# Altium PCB ESP32 with USBC PCB V1.PcbDoc (part 1 of 2)
Units mil, origin at the board's own origin, x right, y up, seen from the top; angles counter-clockwise.
Board outline 2700 x 1000 mil, 4 copper layers (L1, L2, L3, L4), stack 61.581 mil thick; 66 components, 75 nets, 307 pads, 155 vias.
Unrouted connection lines stored in the file: 1.
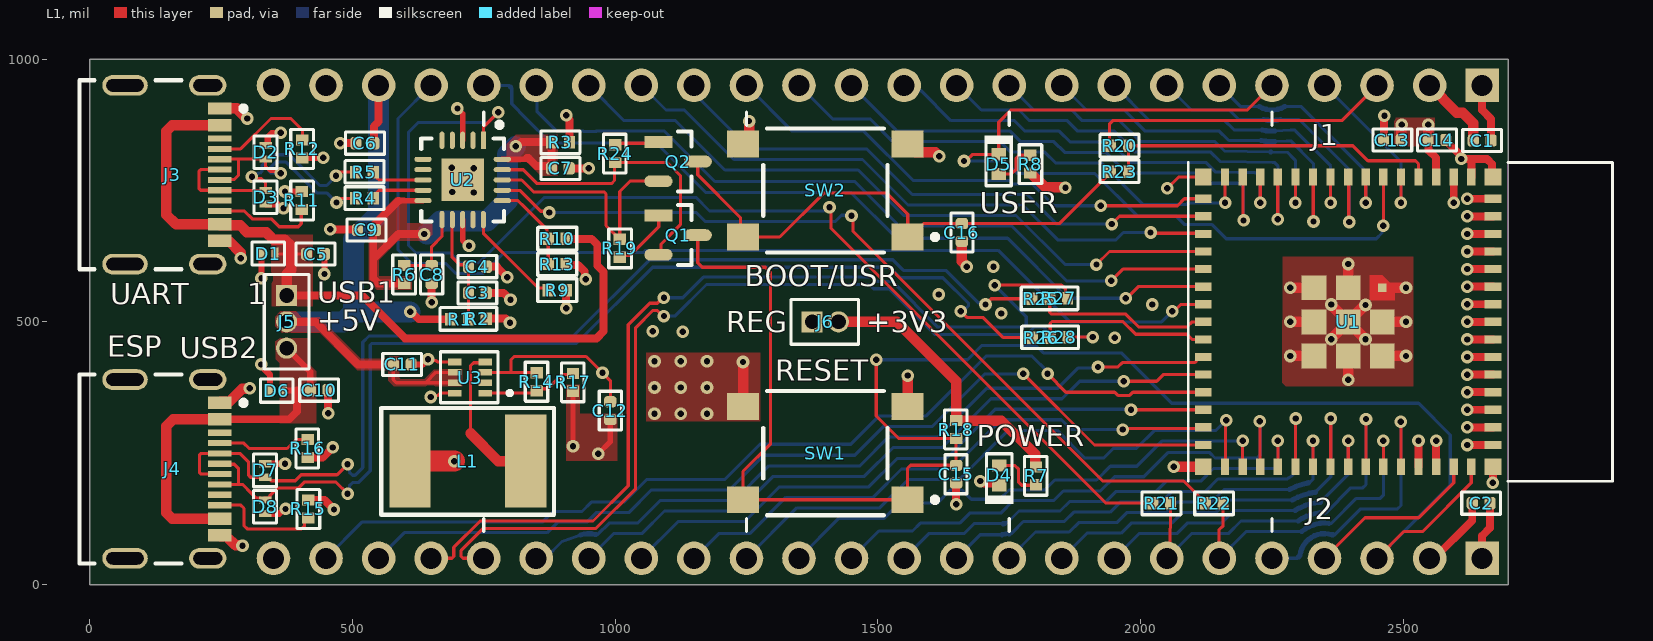
[diagram p0: L1 view]
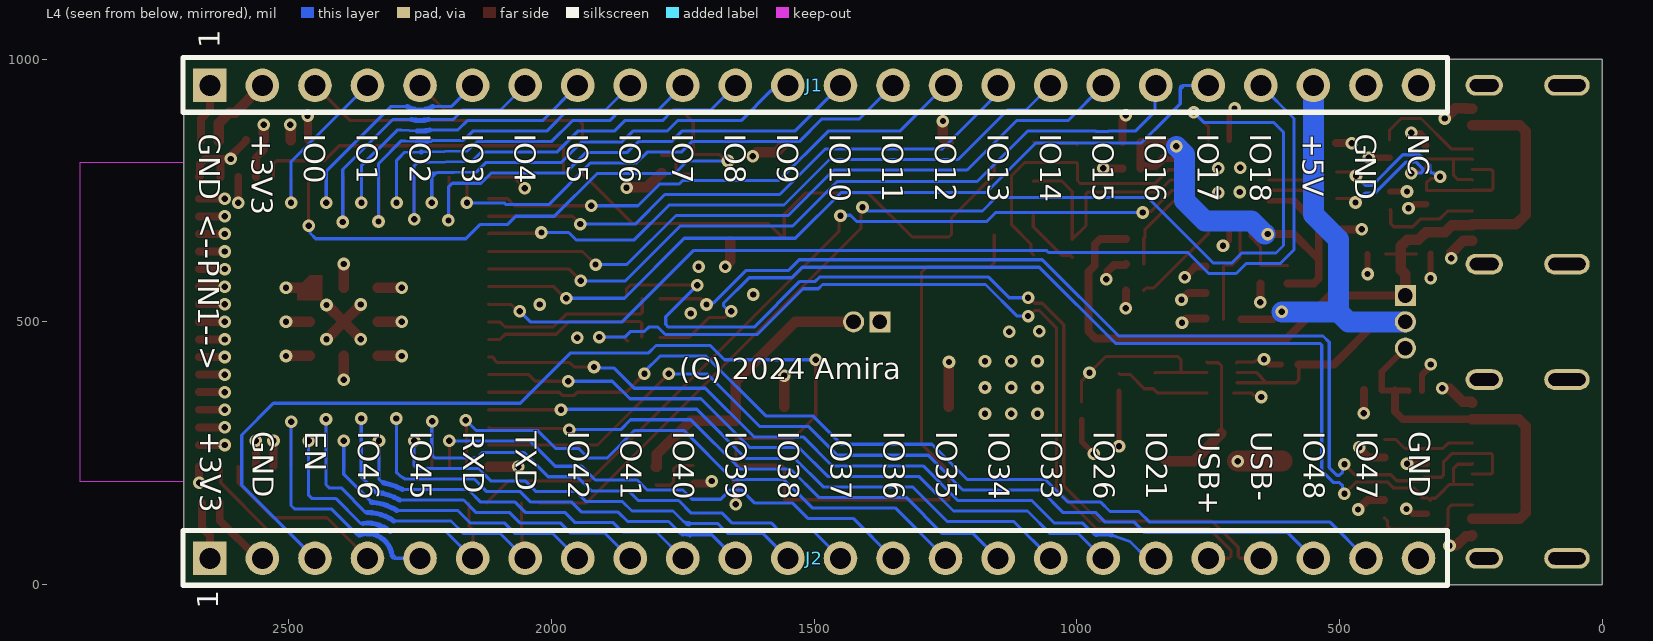
[diagram p1: L4 view, seen from below]
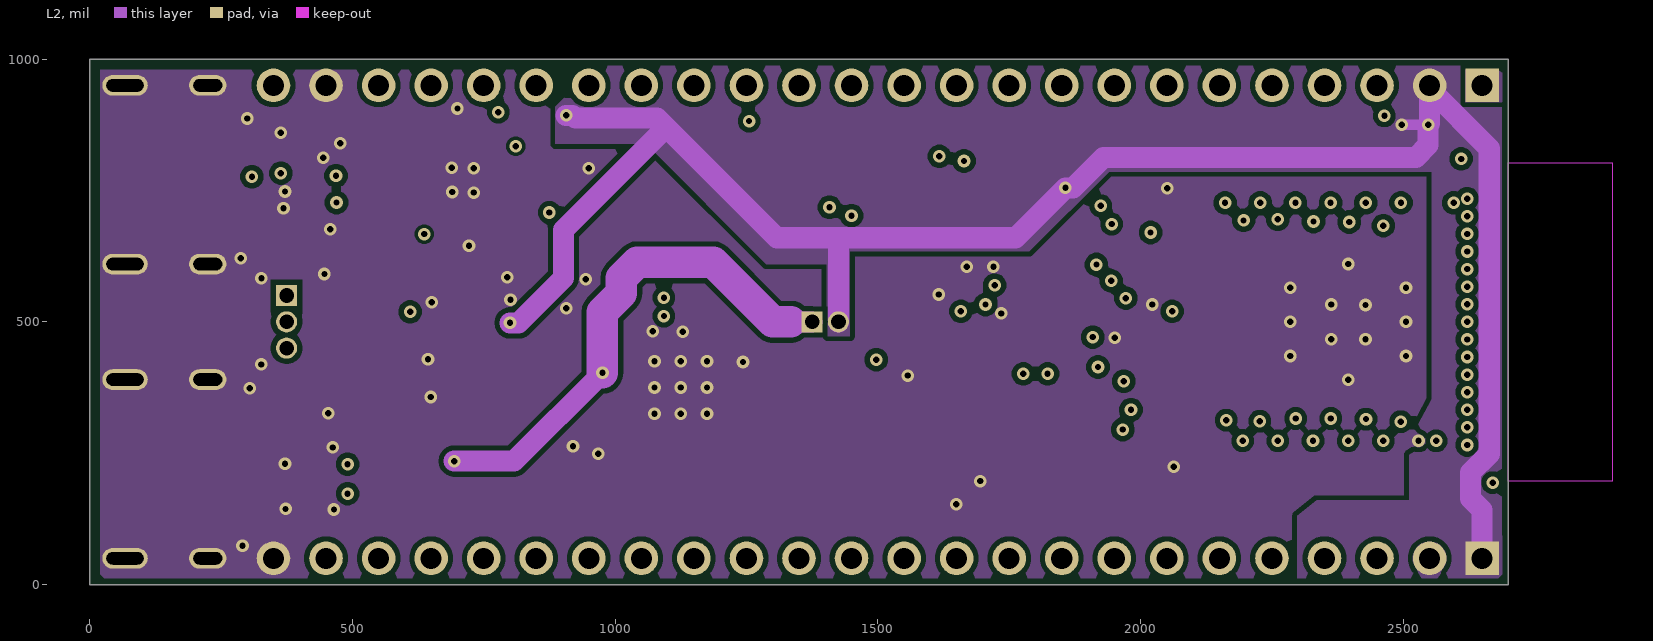
[diagram p2: L2]
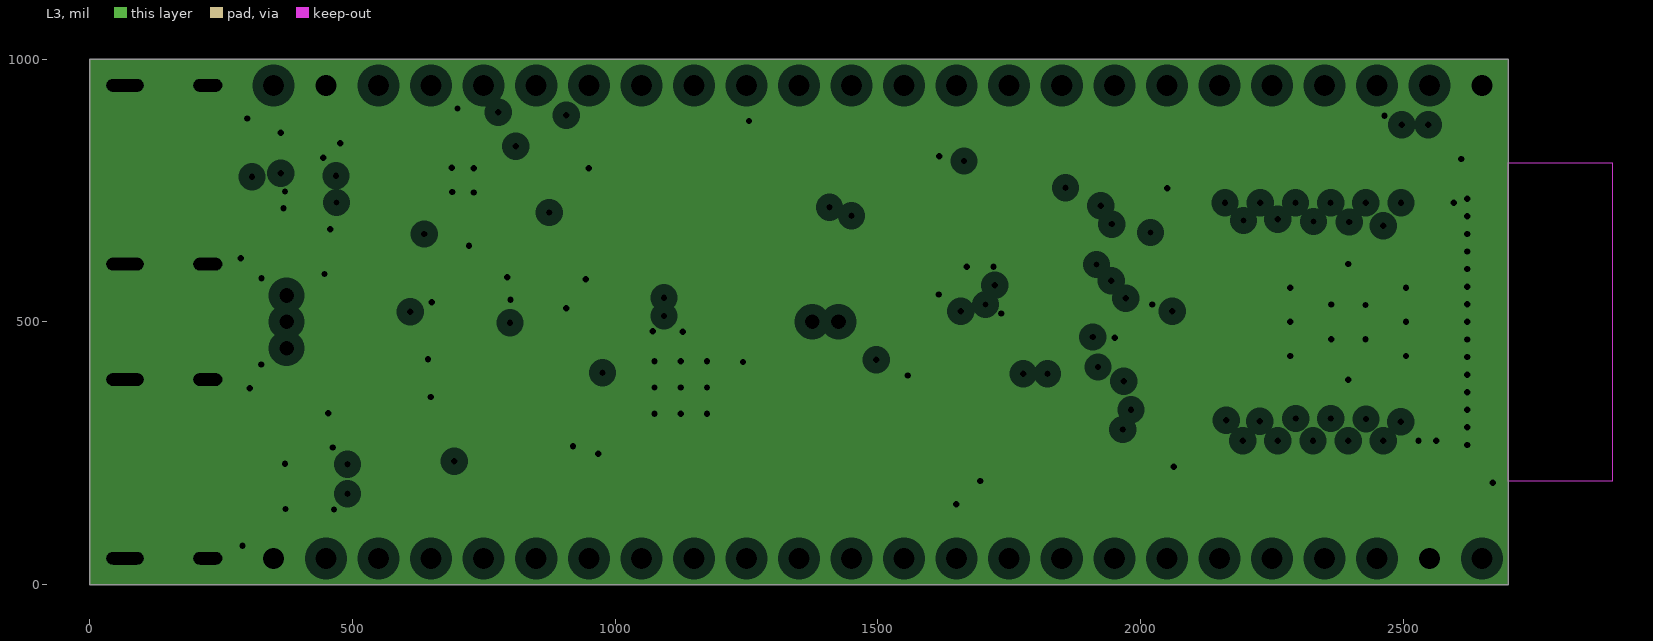
[diagram p3: L3, clearances drawn from the general rule]
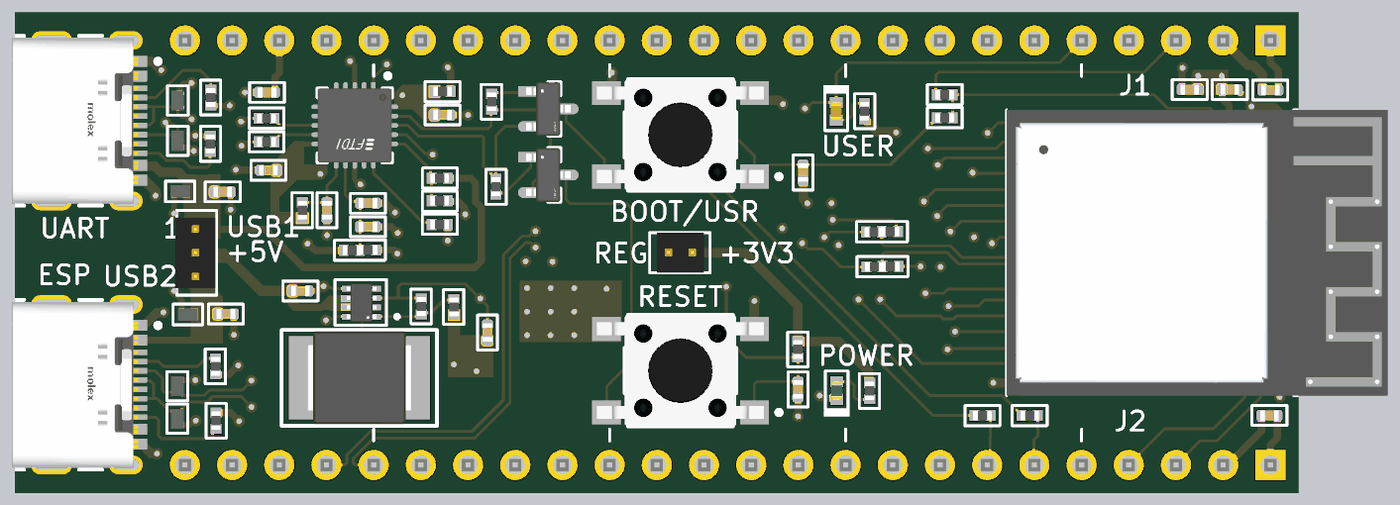
[diagram p4: 3D render of the assembled board from above, using the file's embedded part models]

## Layer stack, top to bottom
Top Solder: solder mask 0.4, Solder Resist, Dk 3.5
L1: signal copper 1.378
Dielectric 2: prepreg 3.913, PP-006, Dk 4.1
L2: signal copper 0.598
Dielectric 1: dielectric 49.803, FR-4, Dk 4.8
L3: plane copper 0.598, net GND
Dielectric 3: prepreg 3.913, PP-006, Dk 4.1
L4: signal copper 1.378
Bottom Solder: solder mask 0.4, Solder Resist, Dk 3.5

## Board outline
0,0 2700,0 2700,1000 0,1000

## Design rules (kind name [scope] priority, off if disabled: settings)
Clearance SMALLER [WithinRoom('FTDI') or WithinRoom('USBC2') or WithinRoom('USBC1') OR WithinRoom('CONVERTOR')] p1: gap=6 ignorepadtopadclearanceinfootprint=FALSE
Clearance DIFF90Clearance [InDifferentialPairClass('DIFF90')] p2: gap=8 ignorepadtopadclearanceinfootprint=FALSE
Clearance [All] p3: gap=10 ignorepadtopadclearanceinfootprint=FALSE except(6: SMDPad-SMDPad)
ComponentClearance R28R26 [InComponent('R28') vs InComponent('R26')] p1: gap=0 collisioncheckmode=3 verticalgap=0 showdistances=FALSE
ComponentClearance R1R2 [InComponent('R1') vs InComponent('R2')] p2: gap=0 collisioncheckmode=3 verticalgap=0 showdistances=FALSE
ComponentClearance R25R27 [InComponent('R25') vs InComponent('R27')] p3: gap=0 collisioncheckmode=3 verticalgap=0 showdistances=FALSE
ComponentClearance [All] p4: gap=10 collisioncheckmode=3 verticalgap=10 showdistances=FALSE
DiffPairsRouting DIFF90 [InDifferentialPairClass('DIFF90')] p1: maxlimit=8.1 minlimit=7 mostfreqgap=8 toplayer_minwidth=6.03 toplayer_maxwidth=6.23 toplayer_prefwidth=6.03 midlayer1_minwidth=5.1 midlayer1_maxwidth=5.2 midlayer1_prefwidth=5.1 bottomlayer_minwidth=6.03 bottomlayer_maxwidth=6.23 bottomlayer_prefwidth=6.03 maxuncoupledlength=500
MinimumSolderMaskSliver [All] p1: minsoldermaskwidth=3.15
PlaneClearance [All] p1: clearance=20
PlaneConnect [All] p1: pad.planeconnectstyle=Relief pad.reliefexpansion=20 pad.reliefentries=4 pad.reliefconductorwidth=20 pad.reliefairgap=10 via.planeconnectstyle=Direct via.reliefexpansion=20 via.reliefentries=4 via.reliefconductorwidth=10 via.reliefairgap=10
PolygonConnect [All] p1: connectstyle=Direct reliefconductorwidth=10 reliefentries=4 polygonreliefangle="90 Angle" airgapwidth=10
RoomDefinition CONVERTOR [False vs False] p1: confinementstyle=ConfineIn formatcopy=TRUE lockcomponents=FALSE outline 661,447 790,447 790,341 661,341
RoomDefinition USBC2 [False vs False] p2: confinementstyle=ConfineIn formatcopy=TRUE lockcomponents=FALSE outline 153,370 308,370 308,73 153,73
RoomDefinition USBC1 [False vs False] p3: confinementstyle=ConfineIn formatcopy=TRUE lockcomponents=FALSE outline 171,925 301,925 301,635 171,635
RoomDefinition FTDI [False vs False] p4: confinementstyle=ConfineIn formatcopy=TRUE lockcomponents=FALSE outline 827,650 600,650 600,895 827,895
RoutingVias [All] p1: holewidth=12 width=24 viastyle="Through Hole" minholewidth=12 minwidth=24 maxholewidth=12 maxwidth=24
SilkToSilkClearance [All] p1: silktosilkclearance=6
SilkToSolderMaskClearance [IsPad] p1: minsilkscreentomaskgap=6 clearancetoexposedcopper=TRUE
SolderMaskExpansion [All] p1: expansion=2 istentingtop=FALSE
SupplyNets "Schematic Supply Nets_6" [InNet('GND')] p1: voltage=0.000
SupplyNets "Schematic Supply Nets_5" [InNet('+3V3 REG')] p2: voltage=0.000
SupplyNets "Schematic Supply Nets_4" [InNet('+5V_VBUS2')] p3: voltage=0.000
SupplyNets "Schematic Supply Nets_3" [InNet('+5V_VBUS1')] p4: voltage=0.000
SupplyNets "Schematic Supply Nets_1" [InNet('+5V')] p5: voltage=0.000
SupplyNets "Schematic Supply Nets" [InNet('+3V3')] p6: voltage=0.000
Width [All] p1: maxlimit=100 minlimit=6 preferedwidth=10 minimp=50.000000 maximp=50.000000 favimp=50.000000
23 further rules are at their usual default settings.

## Classes and differential pairs
differential pair class DIFF90: CON1_USB CON2_USB CON_ESP_USB ESP_USB FTDI_USB
net class DIFF90: CON1_USB_N CON1_USB_P FTDI_USB_N FTDI_USB_P
differential pair FTDI_USB: +FTDI_USB_P -FTDI_USB_N
differential pair ESP_USB: +ESP_USB_P -ESP_USB_N
differential pair CON_ESP_USB: +CON_ESP_USB_P -CON_ESP_USB_N
differential pair CON2_USB: +CON2_USB_P -CON2_USB_N
differential pair CON1_USB: +CON1_USB_P -CON1_USB_N

## Components (designator, comment, footprint, x,y, rotation, side; value= is the part's Value field where it differs from the comment)
C1 "100nF, 50V" CAPC1005X55N 2650,845 r180 top
C2 "100nF, 50V" CAPC1005X55N 2648.07,155 r0 top
C3 "4.7uF, 16V" CAPC1005X55N 738,555 r180 top
C4 "100nF, 50V" CAPC1005X55N 738,605 r180 top
C5 "100nF, 50V" CAPC1005X55N 430,629 r180 top
C6 "100nF, 50V" CAPC1005X55N 524,840 r0 top
C7 "100nF, 50V" CAPC1005X55N 896,792 r180 top
C8 "100nF, 50V" CAPC1005X55N 651,590.07 r90 top
C9 "100nF, 50V" CAPC1005X55N 527.01,674.82 r0 top
C10 "100nF, 50V" CAPC1005X55N 436.93,370 r180 top
C11 "4.7uF, 16V" CAPC1005X55N 595,419 r180 top
C12 "22uF, 6.3V" CAPC1005X55N 991,331 r90 top
C13 "100nF, 50V" CAPC1005X55N 2479,846 r0 top
C14 "10uF, 10V" CAPC1005X55N 2564,846 r180 top value=10uF
C15 "1uF, 35V" CAPC1005X55N 1649,210 r90 top value=1uF
C16 "100nF, 50V" CAPC1005X55N 1660,670 r90 top
D1 "AQ3045-01ETG" SOD882 340,630 r0 top
D2 "AQ3045-01ETG" SOD882 335,822.8 r270 top
D3 "AQ3045-01ETG" SOD882 335,737.2 r90 top
D4 "GREEN" LED0402G 1731,208 r90 top
D5 "RED" LED0402R 1730,800 r270 top
D6 "AQ3045-01ETG" SOD882 356.2,369 r0 top
D7 "AQ3045-01ETG" SOD882 334,217.2 r270 top
D8 "AQ3045-01ETG" SOD882 334,148.2 r90 top
J1 "0022284245" HDR_1X24_2.54MM 1500,950 r90 bottom locked
J2 "0022284245" HDR_1X24_2.54MM 1500,50 r90 bottom locked
J3 "217179-0001" FP-2171790001-MFG 112.8,779.92 r270 top locked
J4 "217179-0001" FP-2171790001-MFG 112.8,220.08 r270 top locked
J5 "FTS-103-01-F-S" HDR_1X3_1.27MM 375,550 r0 top locked
J6 "2 Pin Headers" HDR_1X2_1.27MM 1375,500 r90 top locked
L1 "22uH" INDUCTOR 720,235 r180 top
Q1 "SS8050-G" FP-SS8050-G-IPC_B 1120,665 r0 top
Q2 "SS8050-G" FP-SS8050-G-IPC_B 1120,805 r0 top
R1 "0R" RESC1005X37N 704.01,505 r0 top
R2 "0R" RESC1005X37N 737.99,506 r180 top
R3 "0R" RESC1005X37N 896,842 r180 top
R4 "27R" RESC1005X37N 522.99,735 r0 top
R5 "27R" RESC1005X37N 522.99,785 r0 top
R6 "0R" RESC1005X37N 599,590.07 r90 top
R7 "1K" RESC1005X37N 1801,207 r90 top
R8 "1K" RESC1005X37N 1790,800 r270 top
R9 "10K" RESC1005X37N 890,560 r0 top value=10kR
R10 "4K7" RESC1005X37N 890,658 r0 top
R11 "5K1" RESC1005X37N 404,730.99 r270 top value=5.1kR
R12 "5K1" RESC1005X37N 405,829.01 r90 top value=5.1kR
R13 "4K7" RESC1005X37N 890,610 r180 top
R14 "619K" RESC1005X37N 851,386 r90 top
R15 "5K1" RESC1005X37N 416,144.01 r270 top value=5.1kR
R16 "5K1" RESC1005X37N 415,259.02 r90 top value=5.1kR
R17 "84.5K" RESC1005X37N 920,385 r90 top
R18 "10K" RESC1005X37N 1649,295 r90 top value=10kR
R19 "10K" RESC1005X37N 1009,639.99 r270 top value=10kR
R20 "27R" RESC1005X37N 1960,835 r0 top
R21 "0R" RESC1005X37N 2040,155 r180 top
R22 "0R" RESC1005X37N 2140,155 r180 top
R23 "27R" RESC1005X37N 1960,786 r0 top
R24 "10K" RESC1005X37N 1000,820 r90 top value=10kR
R25 "0R" RESC1005X37N 1810.01,544 r0 top
R26 "0R" RESC1005X37N 1811.01,470 r0 top
R27 "0R" RESC1005X37N 1844.01,545 r180 top
R28 "0R" RESC1005X37N 1845.01,471 r180 top
SW1 "PTS645SH50SMTR92LFS" FP-PTS645SH50SMTR92LFS-MFG 1400,250 r180 top locked
SW2 "PTS645SH50SMTR92LFS" FP-PTS645SH50SMTR92LFS-MFG 1400,750 r180 top locked
U1 "ESP32-S3-MINI-1-N8" XCVR_ESP32-S3-MINI-1-N8 2395.04,500 r270 top locked
U2 "FT231XQ-R" FP-QFN-20-IPC_B 710,770 r270 top locked
U3 "Buck converter" SOT50P160X60-8N 724,394 r180 top

## Footprints (in the part's own frame and the unit in brackets; to place one, negate y for a bottom-side part, rotate by r counter-clockwise, add the part's x,y. Pads: shape width x height; smd on the part's side, far side on the other; paste and mask are expansions set on the pad)
CAPC1005X55N [mm]
  rrect53% 0.54x0.6 smd: 1(-0.43,0) 2(0.43,0)
  silkscreen extent -0.94,-0.53 0.94,0.53, body extent -0.5,-0.28 0.5,0.27, height 0.01
FP-2171790001-MFG [mm]
  rect 0.6x1.15 smd paste+0 mask+0: A1B12(-3.2,3.425) A4B9(-2.4,3.425) B1A12(3.2,3.425) B4A9(2.4,3.425)
  rect 0.3x1.15 smd paste+0 mask+0: A5(-1.25,3.425) A6(-0.25,3.425) A7(0.25,3.425) A8(1.25,3.425) B5(1.75,3.425) B6(0.75,3.425) B7(-0.75,3.425) B8(-1.75,3.425)
  rrect100% 1x1.8 hole 1.4 slot 0.6 at 0 deg paste-2539.97 mask+0: S1(-4.32,2.85) S2(4.32,2.85)
  rrect100% 1x2.2 hole 1.8 slot 0.6 at 0 deg paste-2539.97 mask+0: S3(-4.32,-1.15) S4(4.32,-1.15)
  silkscreen extent -4.57,-3.35 4.57,4.7, body extent -4.92,-3.45 4.92,4.1, height 0.25
FP-PTS645SH50SMTR92LFS-MFG [mm]
  rect 1.55x1.3 smd paste+0 mask+0: 1(-3.975,2.25) 2(3.975,2.25) 3(-3.975,-2.25) 4(3.975,-2.25)
  silkscreen extent -5.43,-3 3,3, body extent -4.5,-3 4.5,3, height 5
FP-QFN-20-IPC_B [mm]
  rect 0.84x0.242 smd paste+0 mask+0: 1(-1.916,1)
  rrect100% 0.84x0.242 smd paste+0 mask+0: 2(-1.916,0.5) 3(-1.916,0) 4(-1.916,-0.5) 5(-1.916,-1) 11(1.916,-1) 12(1.916,-0.5) 13(1.916,0) 14(1.916,0.5) 15(1.916,1)
  rrect100% 0.242x0.84 smd paste+0 mask+0: 6(-1,-1.916) 7(-0.5,-1.916) 8(0,-1.916) 9(0.5,-1.916) 10(1,-1.916) 16(1,1.916) 17(0.5,1.916) 18(0,1.916) 19(-0.5,1.916) 20(-1,1.916)
  rect 2.05x2.05 smd paste-1000 mask+0: 21(0,0)
  silkscreen extent -2.79,-2 2,2, body extent -2.59,-2.59 2.59,2.59, height 0.25
FP-SS8050-G-IPC_B [mm]
  rect 1.357x0.572 smd paste+0 mask+0: 1(-0.951,0.95)
  rrect100% 1.357x0.572 smd paste+0 mask+0: 2(-0.951,-0.95) 3(0.951,0)
  silkscreen extent 0,-1.45 0.65,1.45, body extent -1.88,-1.7 1.88,1.7, height 0.25
HDR_1X2_1.27MM [mil]
  rect 40x40 hole 28: 1(0,0)
  round 40 hole 28: 2(0,-50)
  silkscreen extent -42,-88 43,40, body extent -42,-75 43,25, height 155
HDR_1X3_1.27MM [mil]
  rect 40x40 hole 28: 1(0,0)
  round 40 hole 28: 2(0,-50) 3(0,-100)
  silkscreen extent -42,-140 42,40, body extent -45,-125 40,25, height 155
HDR_1X24_2.54MM [mil]
  rect 64x64 hole 40: 1(0,1150)
  round 64 hole 40: 2(0,1050) 3(0,950) 4(0,850) 5(0,750) 6(0,650) 7(0,550) 8(0,450) 9(0,350) 10(0,250) 11(0,150) 12(0,50) 13(0,-50) 14(0,-150) 15(0,-250) 16(0,-350) 17(0,-450) 18(0,-550) 19(0,-650) 20(0,-750) 21(0,-850) 22(0,-950) 23(0,-1050) 24(0,-1150)
  silkscreen extent -51,-1205 53,1201, body extent -49,-1200 49,1200, height 386
INDUCTOR [mm]
  rect 2x4.5 smd: 1(-2.8,0) 2(2.8,0)
  silkscreen extent -4.17,-2.57 4.19,2.59, body extent -2.8,-2.5 2.8,2.5, height 5.31
LED0402G [mm]
  rect 0.6x0.7 smd: 1(-0.475,0) 2(0.475,0)
  silkscreen extent -1.4,-0.69 1.04,0.69, body extent -0.5,-0.3 0.5,0.3, height 0.2
LED0402R [mm]
  rect 0.6x0.7 smd: 1(-0.475,0) 2(0.475,0)
  silkscreen extent -1.4,-0.69 1.04,0.69, body extent -0.5,-0.3 0.5,0.3, height 0.2
RESC1005X37N [mm]
  rect 0.54x0.6 smd: 1(-0.432,0) 2(0.432,0)
  silkscreen extent -0.94,-0.53 0.94,0.56, body extent -0.5,-0.25 0.5,0.25, height 0.37
SOD882 [mm]
  rect 0.35x0.6 smd: 1(-0.325,0) 2(0.325,0)
  silkscreen extent -0.79,-0.56 0.79,0.56, body extent -0.54,-0.34 0.54,0.34, height 0.44
SOT50P160X60-8N [mm]
  rect 0.66x0.32 smd mask+0.05: 1(-0.735,0.75) 2(-0.735,0.25) 3(-0.735,-0.25) 4(-0.735,-0.75) 5(0.735,-0.75) 6(0.735,-0.25) 7(0.735,0.25) 8(0.735,0.75)
  silkscreen extent -2.02,-1.24 1.42,1.22, body extent -0.8,-1.05 0.8,1.05, height 0.6
XCVR_ESP32-S3-MINI-1-N8 [mm]
  rect 0.8x0.4 smd: 0(-7,5.1) 0(-7,5.95) 3(-7,4.25) 4(-7,3.4) 5(-7,2.55) 6(-7,1.7) 7(-7,0.85) 8(-7,0) 9(-7,-0.85) 10(-7,-1.7) 11(-7,-2.55) 12(-7,-3.4) 13(-7,-4.25) 14(-7,-5.1) 15(-7,-5.95) 31(7,-5.95) 32(7,-5.1) 33(7,-4.25) 34(7,-3.4) 35(7,-2.55) 36(7,-1.7) 37(7,-0.85) 38(7,0) 39(7,0.85) 40(7,1.7) 41(7,2.55) 42(7,3.4) 43(7,4.25) 44(7,5.1) 45(7,5.95)
  rect 0.8x0.8 smd: 0(-7,7) 0(-7,-7) 0(7,7) 0(7,-7)
  rect 0.4x0.8 smd: 0(-5.95,7) 0(-5.1,7) 0(-4.25,7) 0(-3.4,7) 0(-2.55,7) 0(-1.7,7) 0(-0.85,7) 0(0,7) 0(0.85,7) 0(1.7,7) 0(2.55,7) 0(3.4,7) 0(4.25,7) 0(5.1,7) 0(5.95,7) 16(-5.95,-7) 17(-5.1,-7) 18(-4.25,-7) 19(-3.4,-7) 20(-2.55,-7) 21(-1.7,-7) 22(-0.85,-7) 23(0,-7) 24(0.85,-7) 25(1.7,-7) 26(2.55,-7) 27(3.4,-7) 28(4.25,-7) 29(5.1,-7) 30(5.95,-7)
  rect 0.4x0.4 smd paste-1 mask+0: 0(-1.65,1.65)
  rect 1.2x1.2 smd: 0(-1.65,0) 0(-1.65,-1.65) 0(0,1.65) 0(0,0) 0(0,-1.65) 0(1.65,1.65) 0(1.65,0) 0(1.65,-1.65)
  L1 region: -1.05,1.05 -2.25,1.05 -2.25,1.65 -1.65,2.25 -1.05,2.25
  Keep-Out Layer region: 7.7,7.725 -7.7,7.725 -7.7,12.775 7.7,12.775
  Keep-Out Layer region: 7.7,7.725 -7.7,7.725 -7.7,12.775 7.7,12.775
  silkscreen extent -7.7,-7.73 7.7,12.78, body extent -7.7,-7.73 7.7,12.78, height 2.55

## Part data
C1 C2 C4 C5 C6 C7 C8 C9 C10 C13 C16: library part CL05B104KB54PNC, "CAP CER 0.1UF 50V X7R 0402", Capacitor Type=Ceramic, LCSC Part Number=C307331, Manufacturer=Samsung, Supplier Part Number=1276-CL05B104KB54PNCCT-ND, Category="Ceramic Capacitors", ComponentLink1Description=https://datasheet.ciiva.com:443/pdfs/VipMasterIC/IC/SEMS/SEMS-S-A0006318249/SEMS-S-A0006320959-1.pdf?src-supplier=IHS+Markit, ComponentLink1URL=https://datasheet.ciiva.com:443/pdfs/VipMasterIC/IC/SEMS/SEMS-S-A0006318249/SEMS-S-A0006320959-1.pdf?src-supplier=IHS+Markit, ComponentLink2Description=https://datasheet.octopart.com/CL05B104KB54PNC-Samsung-datasheet-8326407.pdf?src-supplier=TME, ComponentLink2URL=https://datasheet.octopart.com/CL05B104KB54PNC-Samsung-datasheet-8326407.pdf?src-supplier=TME, Dielectric Material=Ceramic, Manufacturer Part Number=CL05B104KB54PNC, Pins=2, Pricing="1=0.1, 10=0.036, 50=0.0246, 100=0.0211, 500=0.01508, 1000=0.0132, 2500=0.01122, 5000=0.01002 (USD)", Reach SVHC Compliant=Yes, RoHS=Yes, RoHS Compliant=Yes, Stock=1742901, Supplier=Digikey
C3 C11: library part CL05A475MO5NUNC, "16V 4.7uF X5R ±20% 0402 Multilayer Ceramic Capacitors MLCC - SMD/SMT ROHS", LCSC Part Number=C318563, Manufacturer="Samsung Electro-Mechanics", Manufacturer Part Number=CL05A475MO5NUNC, Supplier=LCSC
C12: library part CL05A226MQ5QUNC, "6.3V 22uF X5R ±20% 0402 Multilayer Ceramic Capacitors MLCC - SMD/SMT ROHS", Manufacturer="Samsung Electro-Mechanics", Supplier Part Number=C105226, Manufacturer Part Number=CL05A226MQ5QUNC, Supplier=LCSC
C14: library part CL05A106MP8NUB8, "CAP CER 10UF 10V X5R 0402", Capacitor Type=Ceramic, Case/Package=0402, LCSC Part Number=C307415, Manufacturer=Samsung, Max Operating Temperature=85°C, Min Operating Temperature=-55°C, Package Shape=Rectangular, Rated DC Voltage (URdc)=10V, Supplier Part Number=1276-6830-1-ND, Temperature Characteristics Code=X5R, Tolerance  (fill in as +-)=20%, Category="Ceramic Capacitors", ComponentLink1Description=https://datasheet.ciiva.com:443/pdfs/VipMasterIC/IC/SEMS/SEMS-S-A0008521219/SEMS-S-A0008521325-1.pdf?src-supplier=IHS+Markit, ComponentLink1URL=https://datasheet.ciiva.com:443/pdfs/VipMasterIC/IC/SEMS/SEMS-S-A0008521219/SEMS-S-A0008521325-1.pdf?src-supplier=IHS+Markit, ComponentLink2Description=http://www.samsungsem.com/kr/support/product-search/mlcc/CL05A106MP8NUB8.jsp?src-supplier=Digikey, ComponentLink2URL=http://www.samsungsem.com/kr/support/product-search/mlcc/CL05A106MP8NUB8.jsp?src-supplier=Digikey, ComponentLink3Description=https://datasheet.octopart.com/CL05A106MP8NUB8-Samsung-Electro-Mechanics-datasheet-136460857.pdf?src-supplier=Future+Electronics, ComponentLink3URL=https://datasheet.octopart.com/CL05A106MP8NUB8-Samsung-Electro-Mechanics-datasheet-136460857.pdf?src-supplier=Future+Electronics, Dielectric Material=Ceramic, JESD-609 Code=e3, Manufacturer Part Number=CL05A106MP8NUB8, Mounting Technology="Surface Mount", Multilayer=Yes, Packaging="Tape and Reel", Pins=2, Pricing="1=0.33, 10=0.215, 50=0.1584, 100=0.129, 500=0.1018, 1000=0.08597, 2500=0.08145 (USD)", Reach SVHC Compliant=Yes, RoHS=Yes, RoHS Compliant=Yes, Stock=663840, Supplier=Digikey, Terminal Finish=Nickel, Termination=Wraparound, Tolerance (fill in as +-)=20%
C15: library part CL05A105KL5NRNC, "CAP CER 1UF 35V X5R 0402", Capacitor Type=Ceramic, Case/Package=0402, LCSC Part Number=C307413, Manufacturer=Samsung, Max Operating Temperature=85°C, Min Operating Temperature=-55°C, Package Shape=Rectangular, Rated DC Voltage (URdc)=35V, Supplier Part Number=1276-6796-1-ND, Temperature Characteristics Code=X5R, Tolerance  (fill in as +-)=10%, Category="Ceramic Capacitors", ComponentLink1Description=https://datasheet.ciiva.com:443/pdfs/VipMasterIC/IC/SEMS/SEMS-S-A0008384515/SEMS-S-A0008872905-1.pdf?src-supplier=IHS+Markit, ComponentLink1URL=https://datasheet.ciiva.com:443/pdfs/VipMasterIC/IC/SEMS/SEMS-S-A0008384515/SEMS-S-A0008872905-1.pdf?src-supplier=IHS+Markit, ComponentLink2Description=http://www.samsungsem.com/kr/support/product-search/mlcc/CL05A105KL5NRNC.jsp?src-supplier=Digikey, ComponentLink2URL=http://www.samsungsem.com/kr/support/product-search/mlcc/CL05A105KL5NRNC.jsp?src-supplier=Digikey, Dielectric Material=Ceramic, JESD-609 Code=e3, Manufacturer Part Number=CL05A105KL5NRNC, Mounting Technology="Surface Mount", Multilayer=Yes, Packaging="Tape and Reel", Pins=2, Pricing="1=0.33, 10=0.212, 50=0.149, 100=0.1202, 500=0.08934, 1000=0.07818, 2500=0.07446, 5000=0.06887 (USD)", Reach SVHC Compliant=Yes, RoHS=Yes, RoHS Compliant=Yes, Stock=291127, Supplier=Digikey, Terminal Finish=Nickel, Termination=Wraparound, Tolerance (fill in as +-)=10%
D1 D2 D3 D6 D7 D8: "TVS DIODE 5.3VWM 12VC SOD882", LCSC Part Number=C3710326, Manufacturer=Littelfuse, Max Breakdown Voltage=9V, Max Operating Temperature=150°C, Min Breakdown Voltage=6.8V, Min Operating Temperature=-55°C, Non-rep Peak Rev Power Dis-Max=40W, Package Body Material=Plastic, Package Shape=Rectangular, Package Style="CHIP CARRIERMeter", Rep Pk Reverse Voltage-Max=5.3V, Supplier Part Number=F9321CT-ND, Category="TVS Diodes", ComponentLink1Description=https://datasheet.ciiva.com:443/pdfs/VipMasterIC/IC/LFSI/LFSI-S-A0007892042/LFSI-S-A0007892042-1.pdf?src-supplier=IHS+Markit, ComponentLink1URL=https://datasheet.ciiva.com:443/pdfs/VipMasterIC/IC/LFSI/LFSI-S-A0007892042/LFSI-S-A0007892042-1.pdf?src-supplier=IHS+Markit, ComponentLink2Description=https://www.littelfuse.com/~/media/electronics/datasheets/tvs_diode_arrays/littelfuse_tvs_diode_array_aq3045_datasheet.pdf.pdf?src-supplier=Digikey, ComponentLink2URL=https://www.littelfuse.com/~/media/electronics/datasheets/tvs_diode_arrays/littelfuse_tvs_diode_array_aq3045_datasheet.pdf.pdf?src-supplier=Digikey, ComponentLink3Description=http://www.littelfuse.com/~/media/electronics/datasheets/tvs_diode_arrays/littelfuse_tvs_diode_array_aq3045_datasheet.pdf.pdf?src-supplier=Digikey, ComponentLink3URL=http://www.littelfuse.com/~/media/electronics/datasheets/tvs_diode_arrays/littelfuse_tvs_diode_array_aq3045_datasheet.pdf.pdf?src-supplier=Digikey, Diode Element Material=SILICON, Diode Type="TRANS VOLTAGE SUPPRESSOR", Manufacturer Part Number=AQ3045-01ETG, Number of Elements=1, Pins=2, Polarity=Bidirectional, Pricing="1=0.48, 10=0.321, 100=0.2174, 500=0.16954, 1000=0.15367, 2000=0.14015, 5000=0.12532 (USD)", Reach SVHC Compliant=Yes, Reference Standard=AEC-Q101, RoHS=Yes, RoHS Compliant=Yes, Stock=19413, Supplier=Digikey, Surface Mount=Yes, Technology=AVALANCHE, Terminal Form="No Lead", Terminal Position=BOTTOM
D4: library part VLMG1500-GS08, "20mA 35mcd 571nm Yellow Green 130° 2V 0402 LED Indication - Discrete ROHS", Manufacturer="Vishay Intertech", Supplier Part Number=C511404, Manufacturer Part Number=VLMG1500-GS08, Supplier=LCSC
D5: library part VLMS1500-GS08, "20mA 54mcd -30℃~+85℃ 631nm Red 130° 75mW 2V 0402 LED Indication - Discrete ROHS", Manufacturer="Vishay Intertech", Supplier Part Number=C511370, Manufacturer Part Number=VLMS1500-GS08, Supplier=LCSC
J1 J2: "Tin Direct Insert 24P 2.54mm Black Single Row Plugin,P=2.54mm Pin Headers ROHS", Manufacturer=MOLEX, Supplier Part Number=C7145888, Manufacturer Part Number=0022284245, Supplier=LCSC
J3 J4: "CONN RCP USB2.0 TYP C 24P SMD RA", LCSC Part Number=C3197684, Manufacturer=Molex, Supplier Part Number=900-2171790001CT-ND, Category="USB Connectors", Manufacturer Part Number=217179-0001, Pricing="1=0.9, 10=0.745, 100=0.6212 (USD)", RoHS=No, Stock=15740, Supplier=Digikey
J5: "CONN HEADER VERT 3POS 1.27MM", Flammability Rating="UL94 V-0", LCSC Part Number=C3333578, Manufacturer=Samtec, Manufacturer Series=FTS, Supplier Part Number=612-FTS-103-01-F-S-ND, Additional Feature="Low Profile", Category=Connectors, ComponentLink1Description=https://datasheet.ciiva.com:443/pdfs/VipMasterIC/IC/SAMI/SAMI-S-A0001504673/SAMI-S-A0001504673-1.pdf?src-supplier=IHS+Markit, ComponentLink1URL=https://datasheet.ciiva.com:443/pdfs/VipMasterIC/IC/SAMI/SAMI-S-A0001504673/SAMI-S-A0001504673-1.pdf?src-supplier=IHS+Markit, ComponentLink2Description=http://suddendocs.samtec.com/prints/fts-1xx-xx-xx-xx-xx-mkt.pdf?src-supplier=Digikey, ComponentLink2URL=http://suddendocs.samtec.com/prints/fts-1xx-xx-xx-xx-xx-mkt.pdf?src-supplier=Digikey, ComponentLink3Description=http://www.samtec.com/documents/webfiles/pdf/FTS.pdf?src-supplier=Avnet, ComponentLink3URL=http://www.samtec.com/documents/webfiles/pdf/FTS.pdf?src-supplier=Avnet, ComponentLink4Description=https://datasheet.octopart.com/FTS-103-01-F-S-Samtec-datasheet-116535195.pdf?src-supplier=Toby+Electronics, ComponentLink4URL=https://datasheet.octopart.com/FTS-103-01-F-S-Samtec-datasheet-116535195.pdf?src-supplier=Toby+Electronics, ComponentLink5Description=https://datasheet.octopart.com/FTS-103-01-F-S-Samtec-datasheet-151470456.pdf?src-supplier=Sager+Electronics, ComponentLink5URL=https://datasheet.octopart.com/FTS-103-01-F-S-Samtec-datasheet-151470456.pdf?src-supplier=Sager+Electronics, Connector Type="BOARD CONNECTOR", Contact Finish - Mating="GOLD (3) OVER NICKEL (50)", Contact Finish - Termination="Matte Tin (Sn) - with Nickel (Ni) barrier", Contact Gender=Male, Contact Material=Bronze, DIN Conformance=No, Filter Feature=No, IEC Conformance=No, JESD-609 Code=e3, Manufacturer Part Number=FTS-103-01-F-S, MIL Conformance=No, Mixed Contacts=No, Mounting Style=STRAIGHT, Mounting Technology=Board, Number of Contacts=3, Number of Rows Loaded=1, Option="General Purpose", Pricing="1=0.73, 50=0.6378, 100=0.5407, 500=0.4491, 1000=0.4 (USD)", Reach SVHC Compliant=Yes, RoHS=Yes, RoHS Compliant=Yes, Stock=2812, Supplier=Digikey, Terminal Pitch=1.27mm, Termination=Solder
J6: library part FTS-102-01-F-S, "3.4A Tin Direct Insert 2P -55℃~+125℃ 1.27mm Black Single Row Phosphor Bronze Plugin,P=1.27mm Pin Headers ROHS", Manufacturer=Samtec, Supplier Part Number=C6045317, Manufacturer Part Number=FTS-102-01-F-S, Supplier=LCSC
L1: library part B82442T1223K050, "1.04A 22uH ±10% 2.05A 238mΩ SMD,5x5.6mm Inductors (SMD) ROHS", Manufacturer=TDK, Supplier Part Number=C2046757, Manufacturer Part Number=B82442T1223K050, Supplier=LCSC
Q1 Q2: "25V 300mW 120@100mA,1V 1.5A NPN SOT-23 Bipolar (BJT) ROHS", Manufacturer="Jiangsu Changjing Electronics Technology Co., Ltd.", Manufacturer Part Number=SS8050-G(RANGE:120-200), Supplier Part Number=C164886, Supplier=LCSC
R1 R2 R3 R6 R21 R22 R25 R26 R27 R28: library part RC0402JR-070RL, "62.5mW Thick Film Resistors 50V ±5% 0Ω 0402 Chip Resistor - Surface Mount ROHS", Manufacturer=YAGEO, Supplier Part Number=C60485, Manufacturer Part Number=RC0402JR-070RL, Supplier=LCSC
R4 R5 R20 R23: library part RC0402FR-0727RL, "RES 27 OHM 1% 1/16W 0402", Case/Package=0402, LCSC Part Number=C138021, Manufacturer=Yageo, Max Operating Temperature=155°C, Min Operating Temperature=-55°C, Package Height=0.35mm, Package Length=1mm, Package Shape=Rectangular, Package Style=SMTMeter, Package Width=0.5mm, Power=62.5mW, Rated Temperature=70°C, Resistor Type="FIXED RESISTOR", Supplier Part Number=YAG3086CT-ND, Temperature Coefficient=100ppm/°C, Tolerance=1%, Working Voltage=50V, Additional Feature="LASER TRIMMABLE", Category="Chip SMD Resistors", ComponentLink1Description=https://datasheet.ciiva.com:443/pdfs/VipMasterIC/IC/YAGO/YAGO-S-A0008145938/YAGO-S-A0008145938-1.pdf?src-supplier=IHS+Markit, ComponentLink1URL=https://datasheet.ciiva.com:443/pdfs/VipMasterIC/IC/YAGO/YAGO-S-A0008145938/YAGO-S-A0008145938-1.pdf?src-supplier=IHS+Markit, ComponentLink2Description=https://datasheet.ciiva.com/11808/0900766b80c66297-11808450.pdf?src-supplier=Rs, ComponentLink2URL=https://datasheet.ciiva.com/11808/0900766b80c66297-11808450.pdf?src-supplier=Rs, ComponentLink3Description=https://datasheet.ciiva.com/7849/1018594-7849927.pdf?src-supplier=Element14, ComponentLink3URL=https://datasheet.ciiva.com/7849/1018594-7849927.pdf?src-supplier=Element14, ComponentLink4Description=https://datasheet.ciiva.com/7849/1018594-7849926.pdf?src-supplier=Element14, ComponentLink4URL=https://datasheet.ciiva.com/7849/1018594-7849926.pdf?src-supplier=Element14, ComponentLink5Description=https://datasheet.ciiva.com/17044/pyu-rc0402-51-rohs-l-6-17044345.pdf?src-supplier=Future+Electronics, ComponentLink5URL=https://datasheet.ciiva.com/17044/pyu-rc0402-51-rohs-l-6-17044345.pdf?src-supplier=Future+Electronics, ComponentLink6Description=https://datasheet.ciiva.com/15189/getdatasheetpartid-327852-15189402.pdf?src-supplier=Verical, ComponentLink6URL=https://datasheet.ciiva.com/15189/getdatasheetpartid-327852-15189402.pdf?src-supplier=Verical, Construction=Chip, JESD-609 Code=e3, Manufacturer Part Number=RC0402FR-0727RL, Mounting Technology="Surface Mount", Packaging="Tape and Reel", Pins=2, Pricing="1=0.1, 10=0.015, 50=0.0088, 100=0.0073, 500=0.00488, 1000=0.00417, 5000=0.00297 (USD)", Reach SVHC Compliant=Yes, RoHS=Yes, RoHS Compliant=Yes, Stock=420660, Supplier=Digikey, Technology="METAL GLAZE/THICK FILM", Terminal Finish=Nickel, Termination=Wraparound
R7 R8: library part RC0402FR-071KL, "62.5mW Thick Film Resistors 50V ±100ppm/℃ ±1% 1kΩ 0402 Chip Resistor - Surface Mount ROHS", Manufacturer=YAGEO, Supplier Part Number=C106235, Manufacturer Part Number=RC0402FR-071KL, Supplier=LCSC
R9 R18 R19 R24: library part AC0402FR-0710KL, "RES SMD 10K OHM 1% 1/16W 0402", Case/Package=0402, LCSC Part Number=C144807, Manufacturer=Yageo, Max Operating Temperature=155°C, Min Operating Temperature=-55°C, Package Height=0.32mm, Package Length=1mm, Package Shape=Rectangular, Package Style=SMTMeter, Package Width=0.5mm, Power=62.5mW, Rated Temperature=70°C, Resistor Type="FIXED RESISTOR", Supplier Part Number=YAG3436CT-ND, Temperature Coefficient=100ppm/°C, Tolerance=1%, Working Voltage=50V, Additional Feature="LASER TRIMMABLE", Category="Chip SMD Resistors", ComponentLink1Description=https://datasheet.ciiva.com:443/pdfs/VipMasterIC/IC/YAGO/YAGO-S-A0003597364/YAGO-S-A0003597364-1.pdf?src-supplier=IHS+Markit, ComponentLink1URL=https://datasheet.ciiva.com:443/pdfs/VipMasterIC/IC/YAGO/YAGO-S-A0003597364/YAGO-S-A0003597364-1.pdf?src-supplier=IHS+Markit, ComponentLink2Description=https://datasheet.ciiva.com/12656/pyu-ac-51-rohs-l-2-12656634.pdf?src-supplier=Mouser, ComponentLink2URL=https://datasheet.ciiva.com/12656/pyu-ac-51-rohs-l-2-12656634.pdf?src-supplier=Mouser, Construction=Chip, JESD-609 Code=e3, Manufacturer Part Number=AC0402FR-0710KL, Mounting Technology="Surface Mount", Packaging="Tape and Reel", Pins=2, Pricing="1=0.1, 10=0.019, 50=0.0116, 100=0.0095, 500=0.00638, 1000=0.00544, 5000=0.00391 (USD)", Reach SVHC Compliant=Yes, Reference Standard=AEC-Q200, RoHS=Yes, RoHS Compliant=Yes, Stock=1550805, Supplier=Digikey, Technology="METAL GLAZE/THICK FILM", Terminal Finish=Nickel, Termination=Wraparound
R10 R13: library part RC0402FR-074K7L, "62.5mW Thick Film Resistors 50V ±100ppm/℃ ±1% 4.7kΩ 0402 Chip Resistor - Surface Mount ROHS", Manufacturer=YAGEO, Supplier Part Number=C105871, Manufacturer Part Number=RC0402FR-074K7L, Supplier=LCSC
R11 R12 R15 R16: library part AC0402FR-075K1L, "RES SMD 5.1K OHM 1% 1/16W 0402", Case/Package=0402, LCSC Part Number=C144745, Manufacturer=Yageo, Max Operating Temperature=155°C, Min Operating Temperature=-55°C, Package Height=0.32mm, Package Length=1mm, Package Shape=Rectangular, Package Style=SMTMeter, Package Width=0.5mm, Power=62.5mW, Rated Temperature=70°C, Resistor Type="FIXED RESISTOR", Supplier Part Number=YAG3503CT-ND, Temperature Coefficient=100ppm/°C, Tolerance=1%, Working Voltage=50V, Additional Feature="LASER TRIMMABLE", Category="Chip SMD Resistors", ComponentLink1Description=https://datasheet.ciiva.com:443/pdfs/VipMasterIC/IC/YAGO/YAGO-S-A0003597364/YAGO-S-A0003597364-1.pdf?src-supplier=IHS+Markit, ComponentLink1URL=https://datasheet.ciiva.com:443/pdfs/VipMasterIC/IC/YAGO/YAGO-S-A0003597364/YAGO-S-A0003597364-1.pdf?src-supplier=IHS+Markit, ComponentLink2Description=https://datasheet.octopart.com/AC0402FR-075K1L-Yageo-datasheet-166720450.pdf?src-supplier=Future+Electronics, ComponentLink2URL=https://datasheet.octopart.com/AC0402FR-075K1L-Yageo-datasheet-166720450.pdf?src-supplier=Future+Electronics, ComponentLink3Description=http://www.yageo.com/documents/recent/PYu-AC_51_RoHS_L_2_revised.pdf?src-supplier=Future+Electronics, ComponentLink3URL=http://www.yageo.com/documents/recent/PYu-AC_51_RoHS_L_2_revised.pdf?src-supplier=Future+Electronics, Construction=Chip, JESD-609 Code=e3, Manufacturer Part Number=AC0402FR-075K1L, Mounting Technology="Surface Mount", Packaging="Tape and Reel", Pins=2, Pricing="1=0.1, 10=0.019, 50=0.0116, 100=0.0095, 500=0.00638, 1000=0.00544, 5000=0.00391 (USD)", Reach SVHC Compliant=Yes, Reference Standard=AEC-Q200, RoHS=Yes, RoHS Compliant=Yes, Stock=79285, Supplier=Digikey, Technology="METAL GLAZE/THICK FILM", Terminal Finish=Nickel, Termination=Wraparound
R14: library part RC0201FR-07124KL, "50mW Thick Film Resistors 25V ±300ppm/℃ ±1% 619kΩ 0201 Chip Resistor - Surface Mount ROHS", Manufacturer=YAGEO, Manufacturer Part Number=AA0201FR-07619KL, Supplier Part Number=C2103175, Supplier=LCSC
R17: library part RC0201FR-0784K5L, "50mW Thick Film Resistors 25V ±1% ±200ppm/℃ 84.5kΩ 0201 Chip Resistor - Surface Mount ROHS", Manufacturer=YAGEO, Supplier Part Number=C138122, Manufacturer Part Number=RC0201FR-0784K5L, Supplier=LCSC
SW1 SW2: "SWITCH TACTILE SPST-NO 0.05A 12V", Contact Current(DC)-Max=50mA, Contact DC Max Rating R Load=0.05A@12VDC, Contact Resistance=0.1mR, Contact Voltage(DC)-Max=12V, Dielectric Withstand Volts=250VACV, Insulation Resistance=100GR, LCSC Part Number=C221869, Manufacturer="ITT C&K", Manufacturer Series=PTS645, Max Operating Temperature=60°C, Min Operating Temperature=-20°C, Supplier Part Number=CKN9085CT-ND, Actuator Type=Pushbutton, Body Breadth=5.9944inch, Body Height=3.4544mm, Body Length or Diameter=5.9944mm, Category="Tactile Switches", ComponentLink1Description=https://datasheet.ciiva.com:443/pdfs/VipMasterIC/IC/CKCI/CKCI-S-A0001796527/CKCI-S-A0001796842-1.pdf?src-supplier=IHS+Markit, ComponentLink1URL=https://datasheet.ciiva.com:443/pdfs/VipMasterIC/IC/CKCI/CKCI-S-A0001796527/CKCI-S-A0001796842-1.pdf?src-supplier=IHS+Markit, ComponentLink2Description=https://datasheet.ciiva.com/29903/getdatasheetpartid-773702-29903807.pdf?src-supplier=Verical, ComponentLink2URL=https://datasheet.ciiva.com/29903/getdatasheetpartid-773702-29903807.pdf?src-supplier=Verical, ComponentLink3Description=https://datasheet.ciiva.com/14920/pts645-14920741.pdf?src-supplier=Digikey, ComponentLink3URL=https://datasheet.ciiva.com/14920/pts645-14920741.pdf?src-supplier=Digikey, ComponentLink4Description=https://datasheet.ciiva.com/22637/1707731-22637356.pdf?src-supplier=Element14, ComponentLink4URL=https://datasheet.ciiva.com/22637/1707731-22637356.pdf?src-supplier=Element14, Electrical Life=100000Cycles, JESD-609 Code=e4, Manufacturer Part Number=PTS645SH50SMTR92LFS, Mounting Technology="Surface Mount", PCB Hole Count=4, Pricing="1=0.35, 10=0.337, 25=0.3172, 100=0.2753, 250=0.24972, 500=0.2323 (USD)", Reach SVHC Compliant=Yes, RoHS=Yes, RoHS Compliant=Yes, Stock=37214, Supplier=Digikey, Switch Action=MOMENTARY, Switch Function=SPST, Switch Type=Keypad, Terminal Finish=Silver, Terminal Length=0.138inch, Termination=Solder
U1: "SMD module, ESP32-S3FN8, 8 MB SPI flash, PCB antenna", LCSC Part Number=C2913206, Manufacturer="Espressif Systems", Supplier Part Number=1965-ESP32-S3-MINI-1-N8CT-ND, Category=LDO, ComponentLink1Description=https://datasheet.octopart.com/ESP32-S3-MINI-1-N8-Espressif-Systems-datasheet-165560562.pdf?src-supplier=TME, ComponentLink1URL=https://datasheet.octopart.com/ESP32-S3-MINI-1-N8-Espressif-Systems-datasheet-165560562.pdf?src-supplier=TME, Manufacturer Part Number=ESP32-S3-MINI-1-N8, Pricing="1=3.1 (USD)", RoHS=No, Stock=15241, Supplier=Digikey
U2: "USB to UART UART QFN-20-EP(4x4) USB Converters ROHS", Case/Package=HVQCCN, LCSC Part Number=C132159, Manufacturer=FTDI, Max Operating Temperature=85°C, Max Supply Current=8.4mA, Max Supply Voltage=5.5V, Min Operating Temperature=-40°C, Min Supply Voltage=2.97V, Nominal Supply Voltage=5V, Package Shape=Square, Package Style="CHIP CARRIER, HEAT SINK/SLUG, VERY THIN PROFILEMeter", Power Supplies=3.3/5V, Temperature Grade=INDUSTRIAL, Category="Interface ICs", ComponentLink1Description=https://datasheet.ciiva.com:443/pdfs/VipMasterIC/IC/FTDI/FTDIS00099/FTDIS00099-1.pdf?src-supplier=IHS+Markit, ComponentLink1URL=https://datasheet.ciiva.com:443/pdfs/VipMasterIC/IC/FTDI/FTDIS00099/FTDIS00099-1.pdf?src-supplier=IHS+Markit, ComponentLink2Description=https://datasheet.ciiva.com/1787/ds-ft231x-1787312.pdf?src-supplier=Digikey, ComponentLink2URL=https://datasheet.ciiva.com/1787/ds-ft231x-1787312.pdf?src-supplier=Digikey, ComponentLink3Description=https://datasheet.ciiva.com/4787/ds-ft231x-13571-4787570.pdf?src-supplier=Mouser, ComponentLink3URL=https://datasheet.ciiva.com/4787/ds-ft231x-13571-4787570.pdf?src-supplier=Mouser, ComponentLink4Description=https://datasheet.ciiva.com/30475/0900766b811020d3-30475405.pdf?src-supplier=Rs, ComponentLink4URL=https://datasheet.ciiva.com/30475/0900766b811020d3-30475405.pdf?src-supplier=Rs, ComponentLink5Description=https://datasheet.ciiva.com/1787/ft-x-series-1787313.pdf?src-supplier=Digikey, ComponentLink5URL=https://datasheet.ciiva.com/1787/ft-x-series-1787313.pdf?src-supplier=Digikey, ComponentLink6Description=https://datasheet.ciiva.com/1787/ft-x-series-1787314.pdf?src-supplier=Digikey, ComponentLink6URL=https://datasheet.ciiva.com/1787/ft-x-series-1787314.pdf?src-supplier=Digikey, Height - Seated (Max)=0.8mm, JESD-30 Code=S-XQCC-N20, Length=4mm, Manufacturer Part Number=FT231XQ-R, Pins=20, Pricing="1=2.34, 25=2.27, 100=2.2, 250=2, 500=1.82002, 1000=1.7625 (USD)", Qualification Status="Not Qualified", Reach SVHC Compliant=Yes, RoHS=Yes, RoHS Compliant=Yes, Stock=60430, Supplier=LCSC, Surface Mount=Yes, Technology=CMOS, Terminal Form="No Lead", Terminal Pitch=0.5mm, Terminal Position=QUAD, Width=4mm
U3: library part TPS629210DRLR, "400mV~5.5V 1A 3V~17V SOT-5x3(DRL)-8 DC-DC Converters ROHS", LCSC Part Number=C5219301, Manufacturer="Texas Instruments", Manufacturer Part Number=TPS629210DRLR, Supplier=LCSC

## Via types
v1: diameter 24, hole 12, L1 to L4, tented both sides, 155 vias

## Nets (pads, with @x,y where several pads share a name; then routed paths per layer and width w, separated by ;. In a path a pad name is that pad's centre, name@x,y a point inside that pad or via, vN(x,y) a via of type N, cw(c..) or ccw(c..) an arc to the next point about the centre after c; other vN are vias at no path point)
+3V3: C1.2 C2.2 C13.2 C14.2 J1.2 J2.1 J6.2 R2.1 R3.1 R7.2 R8.2 R18.2 U1.3 | length 4713.3
  L1 w15: R2.1 792,506 v1(800,498) ; v1(907,893) 907,890.56 913.01,884.56 R3.1 ; C14.2 2548.2,844.87 2548.2,826.16 2562.36,812 U1.3 ; J2.1 2650,93 2665,108 C2.2
  L1 w20: J6.2 1536,500 1649,387 R18.2 1734.99,312.01 1799.19,247.81 1799.19,224.64 1799.82,224.01 R7.2 ; R8.2 1791.18,782.99 1818.41,755.77 1856.23,755.77 v1(1857,755) ; C13.2 2496.46,846.54 2496.46,874.46 v1(2497,875) ; C14.2 v1(2547.14,875) ; J1.2 2602,898 2613.14,898 2633.07,878.07 C1.2
  L2 w20: v1(2497,875) v1(2547.14,875)
  L2 w40: v1(800,498) 816.4,498 902,583.6 902,674.8 1089.46,862.27 ; v1(907,893) 919.32,893 924.32,888 1080,888 1308,660 1425,660 ; J6.2 1425,660 ; J1.2 J1.2@2550,943.57 ; J2.1 2650,142 2628,164 2628,212.88 2663.47,248.35 2663.47,830.1 J1.2@2550,943.57 ; 1425,660 1762,660 v1(1857,755) 1871,755 1929,813 2523.71,813 2547.14,836.43 v1(2547.14,875) 2550,877.86 J1.2@2550,943.57
"+3V3 REG": C12.2 J6.1 L1.2 R14.2 U3.3 | length 1426.1
  L1 w6: U3.3 801.55,403.84 ; R14.2 850.17,403.84 801.55,403.84 ; C12.2 991,388 v1(976,403) 945,434 807.86,434 802,428.14 802,404.29 801.55,403.84
  L1 w40: L1.2 v1(694,235)
  L2 w40: v1(694,235) 808,235 v1(976,403) ; 1334.08,500 J6.1
  L2 w60: v1(976,403) 976,518.53 1012,554.53 1012,582.54 1042.46,613 1187,613 1300,500 1334.08,500
+3V3_FTDI: C7.2 C9.2 R3.2 R6.1 U2.10 U2.20 | length 906
  L1 w10.01: 587.63,730.63 U2.10 ; U2.20 832.37,809.37
  L1 w15: 587.63,729.88 539.93,682.18 539.93,681 539.93,619 ; R6.1 549.15,573.06 539.93,582.28 539.93,619 ; v1(637,667) 587.93,667 539.93,619 ; v1(811,834) 813.44,834 821.44,842 R3.2 R3.2 C7.2@879.03,793.22 ; 832.37,811.87 834.95,811.87 850.51,796.31 875.94,796.31 C7.2@879.03,793.22 ; C7.2 C7.2@879.07,793.18 ; C7.2@879.03,793.22 C7.2@879.07,793.18
  L4 w40: v1@642,667 643,667 668,692 756,692 795,731 795,818 v1(811,834)
+5V: C6.2 C11.2 J1.22 J5.2 R1.1 U3.6 U3.7 | length 1339.2
  L1 w6: C11.2 578,418.93 578,390.02 583.86,384.16 639.46,384.16 ; U3.7 639.46,384.16 ; U3.6 659.15,403.84 639.46,384.16
  L1 w15: J5.2 430,500 511,419 C11.2 ; C6.2 540.93,871.93 550,881 J1.22 ; v1(610,519) 612.44,519 626.44,505 R1.1
  L4 w40: J5.2 483,500 502,519 ; J1.22 550,704.6 502,656.6 502,519 ; v1(610,519) 502,519
+5V_VBUS1: C5.2 D1.2 J3.A4B9 J3.B4A9 J5.1 R10.2 | length 1560.3
  L1 w6: D1.2@353.69,629 383.38,629 C5.2
  L1 w15: J5.1 519,550 600.5,468.5 964.5,468.5 978,482 978,595.36 966,607.36 966,647 955,658 R10.2
  L1 w20: J3.A4B9 157.72,874.41 146,862.69 146,704 164.57,685.43 J3.B4A9 249.13,683.94 286.45,683.94 299.59,670.79 335.79,670.79 350.59,656 371.66,656 383.38,644.28 383.38,629 383.38,599.38 375,591 J5.1
+5V_VBUS2: C10.2 D6.2 J4.A4B9 J4.B4A9 J5.3 | length 721
  L1 w12: D6.2 369.5,369.5 394.5,369.5 419.5,369.5 C10.2 420,405 J5.3
  L1 w15: J4.A4B9 380.03,314.57 394.5,329.04 394.5,369.5
  L1 w20: J4.B4A9 157.41,125.59 146,137 146,301 159.57,314.57 J4.A4B9
+VCC_FTDI: C3.2 C4.2 R1.2 R2.2 U2.12 | length 198.6
  L1 w6: U2.12@690.08,683.06 690.08,682.6 689.99,682.51 689.99,648.01 690,623.03 704.37,608.66 717.42,608.66 C4.2 C3.2 ; R1.2 C3.2@721.04,554.97
BIN_GPIO0: C16.2 Q2.3 R23.1 SW2.1 SW2.2 | length 1025.1
  L1 w6: Q2.3 1157.42,779.58 1238.58,698.42 1238.58,666.34 SW2.2 1313.23,661.42 1396.82,745 1517,745 1557,705 1557,661.92 1561.92,661.92 1586.93,686.93 C16.2 1845.1,686.93 1942.99,784.82 R23.1
CHIP_PU: C15.2 J2.3 Q1.3 R18.1 SW1.1 SW1.2 U1.45 | length 3184.9
  L1 w6: Q1.3 1157.42,612.58 1166,604 1286,604 1296,594 1296,268 1243.5,215.5 SW1.2 SW1.1 1556.5,221.14 1562.35,227 1648.93,227 C15.2 R18.1 1539.77,277.99 1497,320.76 v1(1497,428) ; J2.3 2501,101 2536.79,101 2629.29,193.5 U1.45
  L4 w6: v1(1497,428) 1670.72,428 1697.72,455 1801.07,455 1815.07,441 1963.18,441 2059.18,345 2529.11,345 2589.36,284.75 2589.36,189.36 J2.3
CON1_USB_N: D2.2 J3.A7 J3.B7 R4.1 | length 439.5
  L1 w6.03: J3.A7 248.4,770.84 275.67,770.84 283.29,778.47 283.29,809.43 283,809.72 ; J3.B7 247.91,809.72 283,809.72 ; v1(364,783) 360.56,786.44 344.09,786.44 335,795.53 D2.2 334.72,809.72 283,809.72 ; v1(470,727) 478,735 R4.1
  L4 w6.03: v1(364,783) 345.6,783 342.07,786.53 342.07,791.53 354.58,804.05 373.95,804.05 432.51,745.49 451.01,745.49 469.5,727 v1(470,727)
CON1_USB_P: D3.2 J3.A6 J3.B6 R5.1 | length 504.5
  L1 w6.03: J3.A6 211.53,789.76 208,786.23 208,753.93 211.53,750.39 J3.B6 247.83,750.2 334.8,750.2 D3.2 335,764.47 326.91,772.56 312.44,772.56 v1(309,776) ; v1@470,777 v1(469,778) 476,785 R5.1
  L4 w6.03: v1(309,776) 313.86,776 320.86,783 324.5,783 328.04,786.53 328.04,797.34 348.77,818.08 379.77,818.08 438.33,759.51 451.01,759.51 469,777.5 v1(469,778)
CON2_USB_N: D7.2 J4.A7 J4.B7 R25.1 | length 2071.9
  L1 w6.03: J4.A7 212.53,210.24 209,213.77 209,246.07 212.53,249.61 J4.B7 285.98,249.61 302.59,233 302.59,207.94 306.12,204.41 D7.2 338.92,204.41 345.61,197.72 391.34,197.72 402.63,209 471,209 v1(491,229) ; v1(1705,533) 1716,544 R25.1
  L4 w6.03: v1(491,229) 494.44,225.56 494.44,213.97 500.4,208.01 505.39,208.01 519.97,222.59 519.97,461.25 531.72,473 565.84,473 920.77,472.99 1065.78,618 1528.7,618 1548.7,598 1629.6,598 1691.17,536.44 1701.56,536.44 v1(1705,533)
CON2_USB_P: D8.2 J4.A6 J4.B6 R26.1 | length 2068.8
  L1 w6.03: J4.B6 283,190.55 ; J4.A6 248.4,229.16 275.67,229.16 283.29,221.53 283.29,190.84 283,190.55 ; v1(491,173) 469.03,194.97 408.44,194.97 397.16,183.69 357.69,183.69 342.8,168.8 342.8,164.87 332.3,164.87 327.42,160 327.42,161.97 325.2,164.19 317.76,164.19 308,173.95 291.39,190.55 283,190.55 ; v1(1658,520) 1658.65,520 1670.52,508.14 1700.86,508.14 1739,470 R26.1
  L4 w6.03: v1(491,173) 494.44,176.44 494.44,188.03 500.4,193.99 511.2,193.99 534,216.78 534,455.44 537.53,458.97 560.03,458.97 926.58,458.95 1071.59,603.97 1522.89,603.97 1542.89,583.97 1623.79,583.97 1672.49,535.27 1672.49,530.28 1662.22,520 v1(1658,520)
CON_ESP_USB_N: J2.21 R27.1 | length 1842.1
  L1 w6.03: J2.21 689.45,50 692.99,53.53 692.99,70.87 743.11,121 958,121 1025,188 1025,494.81 1065.7,535.51 1080.48,535.51 1090.97,546 v1(1093,546) ; v1(1722.36,569.83) 1849.83,569.83 1857.33,562.32 1857.33,548.69 R27.1
  L4 w6.03: v1(1093,546) 1129,546 1168.11,585.11 1489.89,585.11 1497.97,577.03 1527.16,577.03 1614.16,490.03 1777.39,490.03 1782.53,495.17 1782.53,509.65 v1(1722.36,569.83)
CON_ESP_USB_P: J2.20 R28.1 | length 1766.8
  L1 w6.03: J2.20 710.55,50 707.01,53.53 707.01,65.06 748.92,106.97 963.81,106.97 1039.03,182.19 1039.03,489 1071.51,521.49 1080.48,521.49 1090.97,511 v1(1093,511) ; R28.1@1854.4,463.39 R28.1 v1(1909,471)
  L4 w6.03: v1(1093,511) 1113.84,511 1173.92,571.08 1484.08,571.08 1492.16,563 1521.35,563 1608.35,476 1783.2,476 1797.19,489.99 1814.9,489.99 1822.98,481.91 1849.26,481.91 1860.16,471 v1(1909,471)
CON_GPIO0: J1.3 R20.1 | length 582.1
  L1 w6: R20.1 1941,836.99 1941,877.14 1946.86,883 2383,883 J1.3
DTR_FTDI: Q2.2 R19.1 U2.18 | length 478.7
  L1 w6: U2.18 822.13,770 827,765.13 845.13,747 979.3,747 982.82,743.49 982.82,683.18 R19.1 1009,748 1029,768 1082.18,768 Q2.2
ESP_USB_N: R25.2 R27.2 U1.23 | length 333.8
  L1 w6.03: R25.2 1827.02,518.25 1830.55,514.72 1971.84,514.72 1996.27,490.28 2088.28,490.28 2098,500 U1.23
ESP_USB_P: R26.2 R28.2 U1.24 | length 333.2
  L1 w6.03: R28.2 1828,497.16 1831.53,500.69 1966.03,500.69 1990.46,476.25 2088.13,476.25 2097.84,466.54 U1.24
FTDI_RESET: C8.2 R6.2 U2.11 | length 147.8
  L1 w6: R6.2 599.04,607.04 C8.2 C8.2 651,643.01 670.63,662.64 U2.11
FTDI_USB_N: R4.2 U2.9 | length 103.5
  L1 w6.03: R4.2 547.61,742.61 547.61,746.86 551.15,750.4 600.13,750.4 600.21,750.32 U2.9
FTDI_USB_P: R5.2 U2.8 | length 103.1
  L1 w6.03: R5.2 547.61,777.39 547.61,773.53 551.15,770 U2.8
GND: C1.1 C2.1 C3.1 C4.1 C5.1 C6.1 C7.1 C8.1 C9.1 C10.1 C11.1 C12.1 C13.1 C14.1 C15.1 C16.1 D1.1 D2.1 D3.1 D4.1 D6.1 D7.1 D8.1 J1.1 J1.23 J2.2 J2.24 J3.A1B12 J3.B1A12 J3.S1 J3.S2 J3.S3 J3.S4 J4.A1B12 J4.B1A12 J4.S1 J4.S2 J4.S3 J4.S4 R9.2 R11.1 R12.1 R13.1 R15.1 R16.1 R17.1 SW1.3 SW1.4 SW2.3 SW2.4 U1.0 U1.42 U1.43 U2.3 U2.13 U2.21 U3.5 U3.8 | length 4038
  L1 w6: v1(644,429) 646.68,426.32 659.52,426.32 662,423.84 694.75,423.84 U3.5 U3.5@696.36,422.23 ; v1(649,357) 651.68,359.68 662.28,359.68 667.07,364.47 U3.8 U3.8@701.76,364.47 ; v1(2051,754) 2072.59,775.59 U1.0@2119.45,775.59
  L1 w10.01: v1(700,906) 710,896 U2.3 ; U2.13 710,655 720,645 v1(722,645) ; v1(920,263) R17.1 ; v1(968,249) 991,272 C12.1
  L1 w12: v1(327,419) 327,415.75 343.41,399.34 D6.1 ; v1(327.1,583.1) 327.1,629.9 D1.1 ; D8.1@334,135 360.75,135 369.75,144 v1(373,144) ; D7.1 v1(372,230) ; D3.1 335.89,723.52 358.23,723.52 365.75,716 v1(369,716) ; D2.1 338.48,835.59 339.37,836.48 339.37,851.37 346.79,858.79 362.79,858.79 v1(364,860) ; v1(372,748) R11.1 ; R12.1 v1(445,812) ; v1(446.93,591.07) C5.1 ; C11.1 634,419 v1(644,429)
  L1 w15: R16.1@414.24,242 418.82,242 419.31,241.5 443.5,241.5 v1(463,261) ; R15.1 446.98,161.02 v1(465,143) ; C10.1 453.86,326.14 v1(454,326) ; v1(458,676) 458.59,675.41 509.49,675.41 C9.1 ; v1(477,840) C6.1 ; v1(651,537) C8.1 ; C3.1 788,555 v1(801,542) ; C4.1 775,605 v1(795,585) ; v1(907,526) R9.2 ; R13.1 908.64,608.37 929.63,608.37 942.28,595.72 942.28,582.72 v1(944,581) ; C7.1 v1(950,792) ; v1(1649,153) C15.1 ; v1(1695,197) 1697.44,197 1702.4,192.04 1728.26,192.04 D4.1 ; C13.1 2463.04,846.96 2463.04,891.04 v1(2464,892) ; U1.42 v1(2528.9,273.57) ; J2.2 2559,50 2631.14,122.14 C2.1 ; U1.43 v1(2562.36,273.57) ; C14.1 2580.93,844.82 2610,815.75 v1(2610,810) 2634.5,810 ; v1(2595.83,726.43) U1.0@2595.83,775.59 ; v1(2621.47,265.75) U1.0@2670.63,265.75 ; v1(2621.47,299.21) U1.0@2670.63,299.21 ; v1(2621.47,332.68) U1.0@2670.63,332.68 ; v1(2621.47,366.14) U1.0@2670.63,366.14 ; v1(2621.47,399.61) U1.0@2670.63,399.61 ; v1(2621.47,433.07) U1.0@2670.63,433.07 ; v1(2621.47,466.54) U1.0@2670.63,466.54 ; v1(2621.47,500) U1.0@2670.63,500 ; v1(2621.47,533.46) U1.0@2670.63,533.46 ; v1(2621.47,566.93) U1.0@2670.63,566.93 ; v1(2621.47,600.39) U1.0@2670.63,600.39 ; v1(2621.47,633.86) U1.0@2670.63,633.86 ; v1(2621.47,667.32) U1.0@2670.63,667.32 ; v1(2621.47,700.79) U1.0@2670.63,700.79 ; v1(2621.47,734.25) U1.0@2670.63,734.25 ; U1.0@2629.29,775.59 2629.67,775.96 2629.67,805.17 2634.5,810 ; J1.1 2650,903 2666.93,886.07 C1.1 ; v1(2670,194) 2670.63,194.63 U1.0@2670.63,224.41 ; U1.0@2670.63,775.59 2669,777.22 2669,800 2659,810 2634.5,810
  L1 w20: J4.B1A12 249.45,92.28 260.28,92.28 277.79,74.77 290.23,74.77 v1(291,74) ; J4.A1B12 249.45,347.87 265.87,347.87 290.85,372.85 303.85,372.85 v1(304.62,373.62) ; J3.B1A12 265.06,653.94 288,631 v1(288,621) ; J3.A1B12 260.18,905.91 260.28,906 279.92,906 298.92,887 v1(300,887) ; v1@1242.74,422.73 v1(1243.5,423.5) SW1.4 ; SW2.4 1255,850.08 v1(1255,882) ; SW1.3 1556.5,397.5 v1(1556.75,397.75) v1@1557,398 ; SW2.3 1572.09,822.99 1609.01,822.99 v1(1617,815) ; C16.1 1660,615.08 1669,606.08 v1(1669,605) ; v1@2063,224 v1(2063.2,224.2) 2063.41,224.41 U1.0@2119.45,224.41 ; v1(2285.04,564.96) v1(2285.04,564.96) U1.0@2330.08,564.96 ; v1(2285.04,435.04) U1.0@2330.08,435.04 ; v1(2285.04,500) U1.0@2330.08,500 ; v1(2363,467) 2363,467.96 U1.0@2395.04,500 ; v1(2363,533) 2363,532.04 U1.0@2395.04,500 ; v1(2395.04,390) U1.0@2395.04,435.04 ; U1.0@2395.04,564.96 v1(2395.04,610) ; v1(2428,467) U1.0@2395.04,500 ; v1(2428,532) 2427.04,532 U1.0@2395.04,500 ; U1.0@2460,435.04 v1(2505.04,435.04) ; U1.0@2460,500 v1(2505.04,500) ; U1.0@2460,564.96 v1(2505.04,564.96)
  L4 w20: v1(2428,467) v1@2428,468
  other v1: 1075,325 1125,325 1175,325 1075,375 1125,375 1175,375 1075,425 1125,425 1175,425 1951,470 1129,481 1072,482 1735,516 2022,533 1616,552 1720,605 731,746 690,747 731,792 689,793
GPIO0: R20.2 R23.2 U1.4 | length 640.2
  L1 w6: R23.2 R20.2 2404,835 2432.5,806.5 2523.04,806.5 2528.9,800.64 U1.4
GPIO1: J1.4 U1.5 | length 335
  L1 w6: v1@2494,725 v1(2495.43,726.43) U1.5
  L4 w6: J1.4 2495.43,804.57 v1(2495.43,726.43)
GPIO2: D5.1 J1.5 U1.6 | length 1650.5
  L1 w6: v1(1664,806) 1667.79,806 1680.49,818.7 D5.1 1730,880.14 1752.86,903 2203,903 J1.5 ; v1(2461.98,683.02) U1.6
  L4 w6: v1(1664,806) 1741.72,806 1765.36,782.36 1913,782.36 1994.36,701 2068,701 2084,685 2136.11,685 2163.11,658 2448.35,658 2459.31,668.96 2459.31,680.34 v1(2461.98,683.02)
GPIO3: J1.6 U1.7 | length 458.1
  L1 w6: v1(2428.5,726.43) U1.7
  L4 w6: J1.6 2187.07,912.93 2190,910 2225.32,910 ; 2274.68,910 2305,910 2307.93,907.07 2428.5,786.5 v1(2428.5,726.43)
  L4 w10: 2225.32,910 ccw(c2250,950) 2274.68,910
GPIO4: J1.7 U1.8 | length 599.8
  L1 w6: U1.8 2396.02,774.61 2396.02,690.98 v1(2397,690)
  L4 w6: J1.7 2097,903 2168.72,903 2183.79,887.93 2186.72,885 2233.75,885 ; 2266.25,885 2301.72,885 2304.64,882.07 2395.04,791.68 2397,789.72 v1(2397,690)
  L4 w10: 2233.75,885 ccw(c2250,950) 2266.25,885
GPIO5: J1.8 U1.9 | length 594.8
  L1 w6: v1(2361.57,726.43) U1.9
  L4 w6: J1.8 2017,883 2160,883 2175.07,867.93 2178,865 2231.45,865 ; 2255.35,863.16 2285.15,865 2293.43,865 2296.36,862.07 2361.57,796.86 v1(2361.57,726.43)
  L4 w10: 2231.45,865 ccw(c2250,950) 2255.35,863.16
GPIO6: J1.9 U1.10 | length 735.7
  L1 w6: U1.10 2328.56,775.15 2328.56,691.44 v1(2329,691)
  L4 w6: J1.9 1897,903 1968.72,903 2008.72,863 2150,863 2165.07,847.93 2168,845 2229.41,845 ; 2255.34,843.13 2255.96,843.16 2277.43,844.43 2285.72,844.43 2329,801.15 v1(2329,691)
  L4 w10: 2229.41,845 ccw(c2250,950) 2255.34,843.13
GPIO7: J1.10 U1.11 | length 732.7
  L1 w6: v1(2294.65,726.43) U1.11
  L4 w6: J1.10 1797,903 1868.72,903 1888.72,883 1960,883 2000,843 2141.72,843 2159.72,825 2247.14,823.03 ; 2247.5,823.02 2279.47,822.4 2291.72,810.15 2294.65,807.22 v1(2294.65,726.43)
  L4 w10: 2247.14,823.03 ccw(c2250,950) 2247.5,823.02
GPIO8: J1.11 U1.12 | length 856.3
  L1 w6: v1(2261,695) 2261.09,695.09 2261.09,775.5 U1.12
  L4 w6: J1.11 1697,903 1768.72,903 1788.72,883 1860.43,883 1880.43,863 1950,863 1990,823 2133.43,823 2151.43,805 2251.39,802.93 2255.32,802.73 2261.18,796.87 2261.18,695.18 v1(2261,695)
GPIO9: J1.12 U1.13 | length 849
  L1 w6: v1(2227.72,726.43) U1.13
  L4 w6: J1.12 1560.33,939.67 1582.33,939.67 1639,883 1760,883 1780,863 1845,863 1865.64,842.36 1942.36,842.36 1981.72,803 2125.15,803 2143.15,785 2151.22,785 2217.92,783.62 2221.94,783.54 2224.79,780.69 2227.72,777.76 v1(2227.72,726.43)
GPIO10: J1.13 U1.14 | length 972.7
  L1 w6: U1.14 2195.13,774.72 2195.13,693.87 v1(2196,693)
  L4 w6: J1.13 1483,917 1537,863 1751.72,863 1771.72,843 1835,843 1855.64,822.36 1934.07,822.36 1973.43,783 2115,783 2134.38,763.62 2188.39,763.62 2196,756.01 v1(2196,693)
GPIO11: J1.14 U1.15 | length 955.4
  L1 w6: v1(2160.79,726.43) U1.15